# Altium PCB PCB--1.PcbDoc
Units mil, origin at the board's own origin, x right, y up, seen from the top; angles counter-clockwise.
Board outline 2001 x 2590 mil, 2 copper layers (Top Layer, Bottom Layer); 46 components, 41 nets, 162 pads, 88 vias.
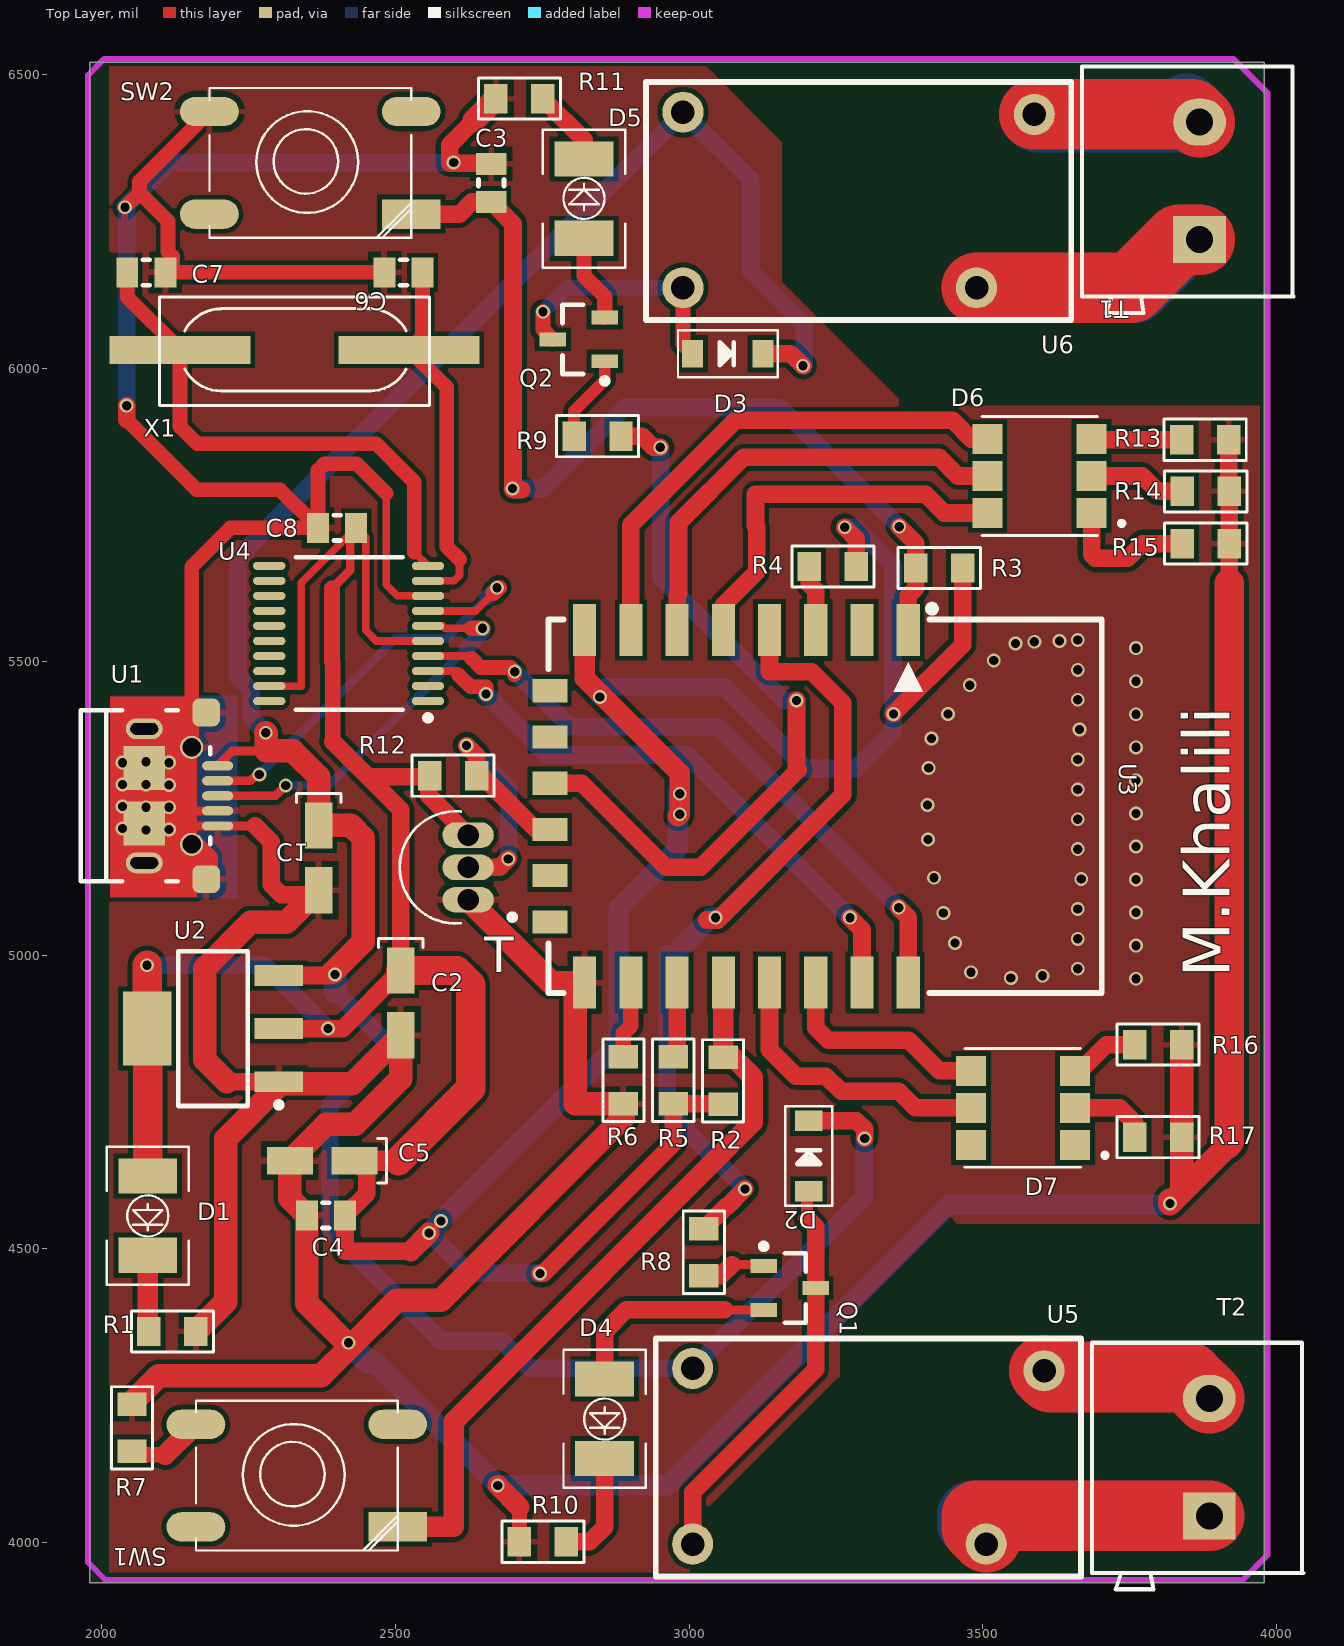
[diagram p0: Top Layer view]
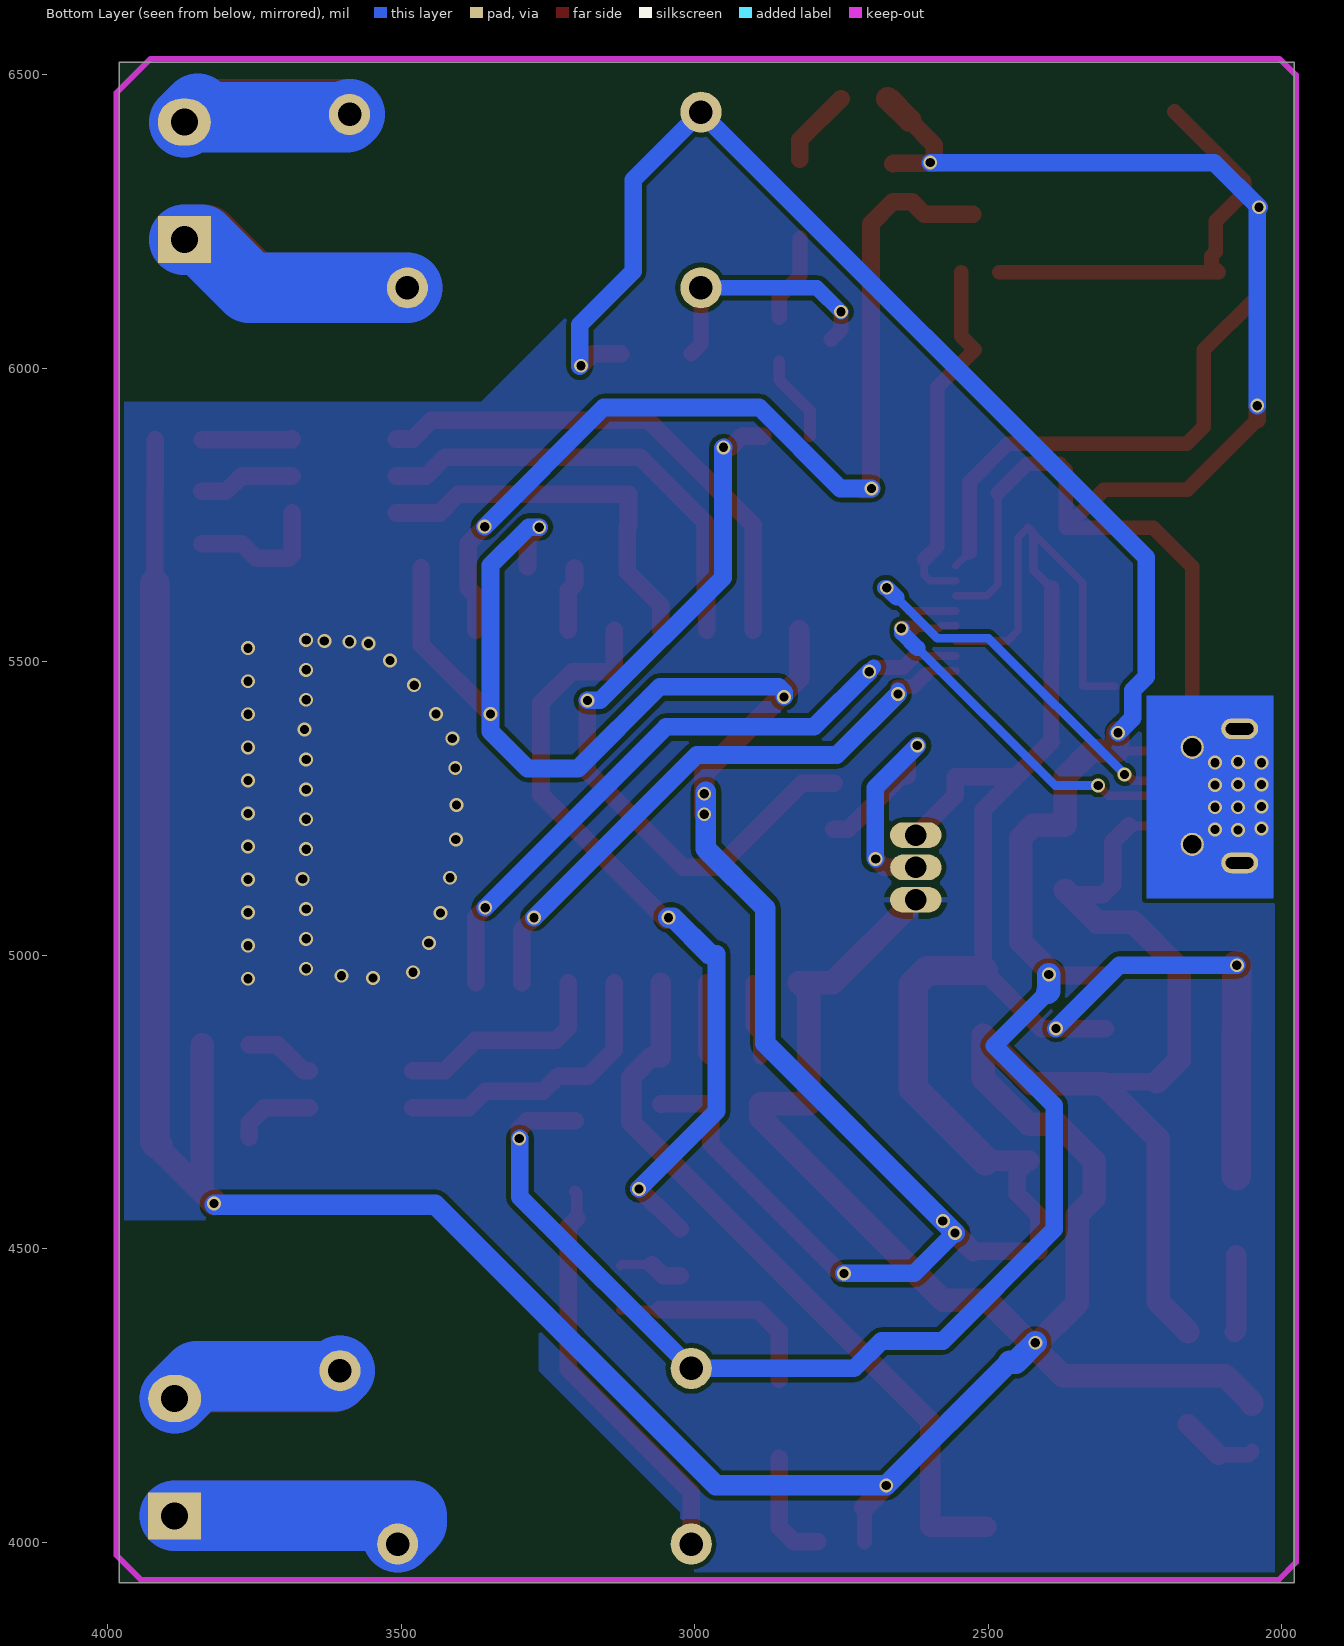
[diagram p1: Bottom Layer view, seen from below]

## Layer stack, top to bottom
Top Solder: solder mask 0.4, Solder Resist, Dk 3.5
Top Layer: signal copper 1.4
Dielectric 1: dielectric 12.6, FR-4, Dk 4.8
Bottom Layer: signal copper 1.4
Bottom Solder: solder mask 0.4, Solder Resist, Dk 3.5

## Board outline
1979,3931 3980,3931 3980,6521 1979,6521

## Design rules (kind name [scope] priority, off if disabled: settings)
Clearance [All] p1: gap=8 ignorepadtopadclearanceinfootprint=FALSE
ComponentClearance ComponentClearance_2 [InComponent('U5')] p1: gap=0 collisioncheckmode=3 verticalgap=0 showdistances=FALSE
ComponentClearance ComponentClearance_1 [InComponent('U6')] p2: gap=0 collisioncheckmode=3 verticalgap=0 showdistances=FALSE
ComponentClearance [All] p3: gap=10 collisioncheckmode=3 verticalgap=10 showdistances=FALSE
PolygonConnect [All] p1: connectstyle=Relief reliefconductorwidth=10 reliefentries=4 polygonreliefangle="90 Angle" airgapwidth=10
RoutingVias [All] p1: holewidth=11.81 width=19.68 viastyle="Through Hole" minholewidth=7.87 minwidth=15.75 maxholewidth=31.5 maxwidth=39.37
SolderMaskExpansion [All] p1: expansion=4
Width [All] p1: maxlimit=400 minlimit=7 preferedwidth=10 minimp=50.000000 maximp=50.000000 favimp=50.000000
29 further rules are at their usual default settings.

## Classes and differential pairs
component class 01_power: C1 C2 D1 R1 U1 U2
component class 02_esp12f: C3 C4 C5 R2 R3 R4 R5 R6 R7 SW1 SW2 U3
component class "03_USB TO UART": C6 C7 C8 U4 X1
component class 04_RELAY: D2 D3 D4 D5 Q1 Q2 R8 R9 R10 R11 T1 T2 U5 U6
component class 05_LEDSTATUS: D6 D7 R13 R14 R15 R16 R17
component class 06_temperture: R12 t T

## Components (designator, comment, footprint, x,y, rotation, side; value= is the part's Value field where it differs from the comment)
C1 "47uF" "CAPP 1206 (3216X18L) Size A" 2369,5221 r270 top
C2 "47uF" "CAPP 1206 (3216X18L) Size A" 2509,4974 r270 top
C3 "100nF" SMD_CAP_0805 2663,6283.04 r90 top
C4 "100nF" SMD_CAP_0805 2413.96,4557 r180 top
C5 "47uF" "CAPP 1206 (3216X18L) Size A" 2430.22,4650 r180 top
C6 "22PF" SMD_CAP_0805 2546,6163.1 r180 top
C7 "22PF" SMD_CAP_0805 2043.04,6163.1 r0 top
C8 "100nF" SMD_CAP_0805 2433,5728 r180 top
D1 "LED-GREEN" TOPLED-GREEN 2078,4624 r270 top
D2 "BZT52C5V6" sod-123 3204,4718 r270 top
D3 "BZT52C5V6" sod-123 3126,6024.66 r180 top
D4 "LED-BLUE" TOPLED-GREEN 2856.07,4278 r270 top
D5 "LED-BLUE" TOPLED-GREEN 2821,6221 r90 top
D6 "SMD-RGB-HI-LIGHT" LED6-SMD-5050 3598,5812.25 r180 top
D7 "SMD-RGB-HI-LIGHT" LED6-SMD-5050 3569.58,4736 r180 top
Q1 "BC817" SOT-23B_N 3171.29,4433.27 r0 top
Q2 "BC8171" SOT-23B_N 2812,6049 r180 top
R1 "330R" 0805R-330 2080,4359 r0 top
R2 "10K" 0805R-10K 3058,4746 r90 top
R3 "10K" 0805R-10K 3466,5659.49 r180 top
R4 "10K" 0805R-10K 3285,5662 r180 top
R5 "10K" 0805R-10K 2972.99,4747 r90 top
R6 "10K" 0805R-10K 2887.98,4747 r90 top
R7 "330R" 0805R-330 2051,4235 r270 top
R8 "100K" 0805R-100K 3025,4524 r270 top
R9 "100K" 0805R-100K 2874,5884 r180 top
R10 "330R" 0805R-330 2791,4001 r180 top
R11 "330R" 0805R-330 2751,6459 r180 top
R12 "4.7K" 0805R-10K 2638,5305.74 r180 top
R13 "330R" 0805R-330 3839,5878 r0 top
R14 "330R" 0805R-330 3840,5790 r0 top
R15 "330R" 0805R-330 3840,5701 r0 top
R16 "330R" 0805R-330 3758.73,4847.77 r0 top
R17 "330R" 0805R-330 3758.73,4690 r0 top
SW1 "SW-PB-A-BLACK-SMD" "SW SMD" 2464.37,4036.16 r180 top
SW2 "SW-PB-A-BLACK-SMD" "SW SMD" 2487.37,6272.16 r180 top
T "DS18B20" TO-92-TO92127P495H2044-3 2593.66,5149.57 r90 top
T1 "2P2S" "Socket Blue 2" 3869.49,6219 r180 top
T2 "2P2S" "Socket Blue 2" 3886,4045 r180 top
U1 "USB Micro B" USB-Micro1 2073.97,5271.45 r90 top locked
U2 "NCP1117ST33T3G" SOT-223 2189,4875 r0 top
U3 "ESP_12_E" ESP_12_E 3373.24,5568.59 r270 top
U4 "CH340T" CH340T 2445.07,5548 r180 top
U5 "Relay_HSIN_DA_982H" Relay-HSIN-DA-982H 3006.07,3997 r0 top
U6 "Relay_HSIN_DA_982H" Relay-HSIN-DA-982H 2989.56,6136.79 r0 top
X1 "12MHz" XTAL-RU49/4 2523,6031 r180 top

## Footprints (in the part's own frame and the unit in brackets; to place one, negate y for a bottom-side part, rotate by r counter-clockwise, add the part's x,y. Pads: shape width x height; smd on the part's side, far side on the other; paste and mask are expansions set on the pad)
0805R-10K [mil]
  rect 40x50 smd: 1(0,0) 2(80,0)
  silkscreen extent -30,-35 110,35, body extent -1,-25 80,25, height 27
0805R-100K [mil]
  rect 40x50 smd: 1(-10,0) 2(70,0)
  silkscreen extent -40,-35 100,35, body extent -11,-25 70,25, height 27
0805R-330 [mil]
  rect 40x50 smd: 1(0,0) 2(80,0)
  silkscreen extent -30,-35 110,35, body extent -1,-25 80,25, height 27
"CAPP 1206 (3216X18L) Size A" [mil]
  rect 78.7x47.2 smd: 1(0,0) 2(110.22,0)
  silkscreen extent -54,-38 -39,38, body extent -17,-36 126,35, height 71
CH340T [mm]
  oval 1.4x0.35 smd: 1(-2.8,2.925) 2(-2.8,2.275) 3(-2.8,1.625) 4(-2.8,0.975) 5(-2.8,0.325) 6(-2.8,-0.325) 7(-2.8,-0.975) 8(-2.8,-1.625) 9(-2.8,-2.275) 10(-2.8,-2.925) 11(4.07,-2.925) 12(4.07,-2.275) 13(4.07,-1.625) 14(4.07,-0.975) 15(4.07,-0.325) 16(4.07,0.325) 17(4.07,0.975) 18(4.07,1.625) 19(4.07,2.275) 20(4.07,2.925)
  silkscreen extent -2.93,-3.3 2.92,3.77, body extent -2.25,-3.3 3.68,3.3, height 1.2
ESP_12_E [mm]
  rect 2.25x1 smd: 1(0.375,0) 2(0.375,-2) 3(0.375,-4) 4(0.375,-6) 5(0.375,-8) 6(0.375,-10) 7(0.375,-12) 8(0.375,-14) 15(15.625,-14) 16(15.625,-12) 17(15.625,-10) 18(15.625,-8) 19(15.625,-6) 20(15.625,-4) 21(15.625,-2) 22(15.625,0)
  rect 1x1.5 smd: 9(3,-15.5) 10(5,-15.5) 11(7,-15.5) 12(9,-15.5) 13(11,-15.5) 14(13,-15.5)
  silkscreen extent -0.7,-15.57 16.08,8.37, body extent 0,-15.49 16,8.51, height 2.75
LED6-SMD-5050 [mm]
  rect 1.3x1.3 smd: 1(-2.225,1.498) 2(-2.225,-0.102) 3(-2.225,-1.702) 4(2.275,-1.702) 5(2.275,-0.102) 6(2.275,1.498)
  silkscreen extent -3.62,-2.67 2.53,2.47, body extent -2.77,-2.68 2.77,2.42, height 1.6
Relay-HSIN-DA-982H [mil]
  round 70 hole 40: 1(0,0) 2(500,0) 3(0,299.21) 4(598.43,295.28)
  silkscreen extent -63,-55 661,350
SMD_CAP_0805 [mm]
  rect 0.95x1.3 smd: 1(0,0) 2(1.65,0)
  silkscreen extent 0.67,-0.55 0.97,0.55, body extent -0.19,-0.63 1.84,0.63, height 0.65
"Socket Blue 2" [mil]
  rect 90x80 hole 46: 1(0,0)
  oval 90x80 hole 46: 2(0,-200)
  silkscreen extent -160,-295 200,125, body extent -157,-295 200,127, height 493
sod-123 [mm]
  rect 0.9x1.2 smd: A(3.048,0) K(0,0)
  silkscreen extent -0.64,-1.02 3.68,1.02, body extent -0.18,-0.87 3.3,0.87, height 0.79
SOT-23B_N [mm]
  rect 1.15x0.6 smd: 1(-1.125,0.95) 2(-1.125,-0.95) 3(1.125,0)
  silkscreen extent -1.25,-1.5 0.7,1.92, body extent -0.7,-1.5 0.7,1.5, height 1.14
SOT-223 [mm]
  rect 2.1x0.9 smd: 1(2.85,-2.3) 2(2.85,0) 3(2.85,2.3)
  rect 2.1x3.2 smd: 2(-2.85,0)
  silkscreen extent -1.5,-3.42 2.98,3.35, body extent -3.54,-3.25 3.54,3.25, height 1.65
"SW SMD" [mm]
  rect 2.54x1.27 smd: 1(-1,0.25)
  oval 2.54x1.27 smd: 2(7.731,-4.187) 3(-1,-4.187) 4(7.731,0.25)
  silkscreen extent -1,-5.21 7.73,1.27, body extent -0.71,-5.22 7.54,1.27, height 3.56
TO-92-TO92127P495H2044-3 [mm]
  oval 1.11x2.22 hole 0.93: 1(-1.397,-0.762) 2(0,-0.76) 3(1.397,-0.762)
  silkscreen extent -2.43,-2.8 2.43,2.2, body extent -2.28,-1.84 2.28,1.78, height 15.37
TOPLED-GREEN [mil]
  rect 60x100 smd: A(0,0) K(135,0)
  silkscreen extent -50,-70 185,70, body extent -20,-60 154,60, height 75
USB-Micro1 [mm]
  oval 0.4x1.35 smd: 1(1.3,-3.125) 2(0.65,-3.125) 3(0,-3.125) 4(-0.65,-3.125) 5(-1.3,-3.125)
  rrect50% 1.2x1.2 smd: S(-3.606,-2.629) S(3.606,-2.628)
  oval 0.9x1.6 hole 0.5 slot 1.2 at 90 deg: S(-2.9,0.05) S(2.9,0.05)
  round 1 hole 0.8: S(-2.1,-2) S(2.1,-2)
  rect 1.9x1.8 smd: S(-1.2,0.05) S(1.2,0.05)
  silkscreen extent -3.7,-2.8 3.7,2.8, body extent -3.93,-2.9 3.93,2.76, height 2.78
XTAL-RU49/4 [mil]
  rect 240x47.24 smd: 1(0,0) 2(390,0)
  silkscreen extent -35,-90 425,95, body extent -78,-90 468,95, height 120

## Part data
C1 C2 C5: library part Cap-Polar, "Polar Capacitor", Voltage=16V, Adding Date=1387/12/20, Designer="Saeid Jorablo", Organazation=ControTec
C3 C4 C6 C7 C8: library part Cap-Bipolar, "Bipolar Capacitor", Voltage=100V, Adding Date=1387/12/20, Designer="Saeid Jorablo", Organazation=ControTec
D1 D4 D5: library part TOPLED-GREEN, "TOPLED-GREEN"
D2 D3: "DIODE / DIODE-B", Supplier Part Number 1=BZT52C5V6-FDITR-ND, Supplier 1=Digi-Key
D6 D7: library part SMD-RGB-HI-LIGHT(6P-L5.0*W5.0*H1.5MM), "LED Lighting COBs, Engines, Modules - Red, Green, Blue _RGB_", Package="SparkFun Electronics", Availability=Unavailable, MF="SparkFun Electronics", MP=5050RGB, Price=None, SnapEDA_Link=https://www.snapeda.com/parts/5050RGB/SparkFun%20Electronics/view-part/106347/?ref=snap
Q1: "NPN Bipolar Transistor", LatestRevisionDate=29-May-2009, LatestRevisionNote="IPC-7351 Footprint Added.", PackageDescription="3-Pin SOT-23 Package 0.95 mm Pitch, 2.4 mm Lead Span", PackageReference=SOT-23B, PackageVersion=Aug-1999, Published=8-Jun-2000, Publisher="Altium Limited"
Q2: library part BC817, "NPN Bipolar Transistor", LatestRevisionDate=29-May-2009, LatestRevisionNote="IPC-7351 Footprint Added.", PackageDescription="3-Pin SOT-23 Package 0.95 mm Pitch, 2.4 mm Lead Span", PackageReference=SOT-23B, PackageVersion=Aug-1999, Published=8-Jun-2000, Publisher="Altium Limited"
R1 R7 R10 R11 R13 R14 R15 R16 R17: library part 0805R-330, "RESISTOR 0805 1/4 WATT THIN FILM"
R2 R3 R4 R5 R6 R12: library part 0805R-10K, "RESISTOR 0805 1/4 WATT THIN FILM"
R8 R9: library part 0805R-100K, "RESISTOR 0805 1/4 WATT THIN FILM", Supplier Part Number 1=RMCF0805FT100KTR-ND, Supplier 1=Digi-Key
SW1 SW2: "PUSHBUTTON SWITCH 6MM SMD"
T: "Temperature Sensor Digital, Local -55°C ~ 125°C 12 b TO-92-3", Package="TO-92 Maxim Integrated", Availability=Unavailable, MF="Maxim Integrated", MP=DS18B20, Price=None, SnapEDA_Link=https://www.snapeda.com/parts/DS18B20/Maxim%20Integrated/view-part/1266091/?ref=snap
T1 T2: library part "Transformer 2P2S", "Transformer 2 Primary , 2 Secondry", Power=100W, Voltage Ratio=220:9, Adding Date=1387/01/22, Company=ControTEK, Designer="Saeid jorablo"
U1: library part "USB Micro SMD", "USB 2.0, Right Angle, SMT, B Type, Receptacle, 5 Position, Black", PackageDocument=27-Jun-2003, ComponentLink1Description="Manufacturer Link", ComponentLink1URL=http://www.tycoelectronics.com/, ComponentLink2Description="Packaging Specification", ComponentLink2URL=http://ecommas.tycoelectronics.com/commerce/DocumentDelivery/DDEController?Action=showdoc&DocId=Customer+Drawing%7F440247%7FD%7Fpdf%7FEnglish%7FC_440247_D.pdf, ContactMaterial="Copper Alloy", ContactPlating="Gold (30)", DatasheetDocument=27-Jun-2003, DrillSize="Corresponds to nominal value.", HousingMaterial=Thermoplastic, PackageReference=440247, PanelGround=Without, PCB_Layout="Complies with manufacturer's recommendation.", Published=15-Jul-2004, Publisher="Altium Limited"
U2: library part NCP1117, "NCP1117, NCV1117. 1.0 A Low-Dropout Positive  Fixed and Adjustable  Voltage Regulators"
U3: "ESP-12 Wi-Fi Module by AI-Thinker", IC=ESP8266-EX, Vendor=Ai-thinker
X1: library part CRYSTAL-GENERIC, "GENERIC CRYSTAL"

## Via types
v1: diameter 23.62, hole 15.75, Top Layer to Bottom Layer, 88 vias

## Nets (pads, with @x,y where several pads share a name; then routed paths per layer and width w, separated by ;. In a path a pad name is that pad's centre, name@x,y a point inside that pad or via, vN(x,y) a via of type N, cw(c..) or ccw(c..) an arc to the next point about the centre after c; other vN are vias at no path point)
+3V3: C2.1 C4.1 C5.1 C8.1 D1.A R2.1 R3.1 R4.1 R5.1 R12.2 T.3 U2.2 U3.8 U4.5 U4.19 | length 6906
  Top Layer w13: U4.19 2339.57,5458.43 2339.57,5634.57 C8.1@2423,5718 ; C8.1 2449,5712 2449,5553.41 2467.2,5535.2 U4.5
  Top Layer w15: 2392,5625 2423,5656 2423,5718 C8.1
  Top Layer w27: 2392,5625 2392,5500 2393,5499 2393,5364
  Top Layer w30: U2.2@2301.2,4875 v1(2385,4875) 2410,4875 C2.1 2509,5248 2453,5304 ; 2393,5364 2453,5304 ; C5.1 2451,4629.22 2451,4594.04 C4.1 2413.96,4496.04 2526.04,4496.04 ; T.3 2556.26,5271.97 2556.26,5304 2453,5304 ; v1(2746,4458) 2752,4458 2972.99,4678.99 R5.1 3057,4747 R2.1 ; v1(3265,5729) 3285,5709 R4.1 ; v1(3348,5411) 3466,5529 R3.1
  Top Layer w35: C5.1 2505,4650 ; 2526.04,4496.04 v1(2557,4527) ; U3.8 2822.06,5471.94 2984,5310 v1(2984,5275) v1(2984,5240) v1@2981,5237
  Top Layer w50: v1(2076.8,4983) 2076.8,4875 2078,4873.8 D1.A ; 2505,4650 2628,4773 2628,4950 2604,4974 C2.1
  Bottom Layer w30: v1(2076.8,4983) 2277,4983 v1(2385,4875) ; v1(2557,4527) 2626,4458 v1(2746,4458) ; v1(2848,5440) 2848,5448 2857,5457 3060,5457 3199,5318 3285,5318 3348,5381 v1(3348,5411) 3348,5664 3283,5729 v1(3265,5729)
  Bottom Layer w35: v1(2557,4527) v1(2577.52,4547.52) 2880,4850 2880,5080 2981,5181 v1@2981,5278
+5V: C1.1 D2.K D3.K U1.1 U2.3 U5.3 U6.3 | length 4583.3
  Top Layer w15: U1.1 2222.36,5348 2280,5348
  Top Layer w30: U2.3 v1@2387.55,4965.55 ; D3.K 3173.34,6024.66 v1(3194,6004) ; D2.K 3285,4718 3299,4704 v1(3299,4688)
  Top Layer w40: v1(2279,5379) 2280,5378 2280,5348 2325,5348 2369,5304 C1.1 2424,5221 2445,5200 2445,5023 v1@2393,4971
  Bottom Layer w30: v1(2279,5379) 2254,5404 2254,5451.53 2231,5474.53 2231,5677.44 U6.3 3105,6320.56 3105,6165 3196,6074 v1@3196,6003 ; 2399,4937 2490,4846 2388,4744 2388,4533 2578,4343 2682,4343 2728.79,4296.21 U5.3 3298,4588.14 v1@3298,4688
  Bottom Layer w40: v1(2397,4967) 2397,4939 2399,4937
GND: C1.2 C2.2 C3.2 C4.2 C5.2 C6.2 C7.2 C8.2 R1.2 R6.1 R7.1 R10.2 R11.2 R13.2 R14.2 R15.2 R16.2 R17.2 SW2.2 T.1 U1.4 U1.5 U1.S U2.1 U3.15 U4.8 | length 10822.9
  Top Layer w13: 2484,5787 2484,5631 2503.02,5611.98 U4.8
  Top Layer w15: v1@2113,5245.86 U1.4 ; v1@2113.27,5220.27 U1.5 2261,5220.27
  Top Layer w25: v1(2039,6274) 2064,6299 ; 2042,5912 2161,5793 2303.04,5793 C8.2 ; U1.S@2152.71,5354.13 2152.71,5661.71 2219,5728 C8.2 ; SW2.2 2064,6318 2064,6299 ; C6.2 C7.2 2120,6175.1 2120,6190.63 2112.5,6198.13 2112.5,6250.5 2064,6299 ; 2484,5787 2434,5837 2379,5837 2368.04,5826.04 C8.2
  Top Layer w26: R10.2 2711,4060
  Top Layer w30: 2042,5912 v1(2042,5936) ; 2212.55,4784.45 U2.1 ; 2261,5220.27 2288,5193.27 2288,5120 2305,5103 C1.2@2361.22,5103 ; 2634,6422 2592,6380 2592,6349 2662,6349 C3.2 ; 3915,4677 3917,4675 ; R13.2 3919,5791 R14.2 R15.2 3920,5634
  Top Layer w35: v1(2674,4097) 2711,4060
  Top Layer w40: R7.1 2051,4238 2097,4284 2373.65,4284 v1@2422.83,4333.17 ; U1.S@2152.71,5188.78 2177.46,5164.03 U1.S@2177.46,5129.47 ; R1.2 2211,4410 2211,4687.35 2304.65,4781 2426.22,4781 C2.2 2509,4790 2431,4712 2382,4712 C5.2 2320,4586 C4.2 2349,4407 v1@2422.83,4333.17 ; 2212.55,4784.45 2175,4822 2175,4978 2253,5056 2314.22,5056 2361.22,5103 C1.2 ; T.1 2764.79,4953.43 U3.15 2806,4937.38 2806,4747 R6.1 2887.98,4722.98 2577,4412 2501.65,4412 v1@2422.83,4333.17 ; 2634,6422 R11.2 ; v1@3819,4583 v1(3819,4577) 3838.73,4596.73 ; R16.2 R17.2 3838.73,4596.73 ; 3917,4675 3838.73,4596.73
  Top Layer w50: 3915,4677 3920,4682 3920,5634
  Bottom Layer w20: v1(2039,6274) v1@2042,6271
  Bottom Layer w30: v1(2039,6274) 2115,6350 v1(2599,6350) ; v1(2042,5936) v1@2042,6271
  Bottom Layer w35: 2464,4307 v1(2674,4097) 2964,4097 3442,4575 v1@3818,4575
  Bottom Layer w40: v1(2420,4340) 2453,4307 2464,4307
  other v1: 3761,4960 3548,4961 3602,4965 3480,4971 3662,4977 3761,5016.3 3453,5021 3662,5027.91 3433,5072 3761,5072.6 3662,5078.82 3761,5128.9 3668,5129.73 3417,5132 3662,5180.64 3761,5185.2 3407,5197 2075,5213.33 2114,5214 2035,5216 3662,5231.55 3761,5241.5 2075,5252 2114,5252 2035,5253.33 3406,5256 3662,5282.45 2114,5290 2035,5290.67 2075,5290.67 3761,5297.8 3408,5319 2035,5328 2114,5328 2075,5329.33 3662,5333.36 3761,5354.1 3413,5369 3665,5384.27 3761,5410.4 3441,5411 3662,5435.18 3478,5460 3761,5466.7 3662,5486.09 3519,5502 3761,5523 3556,5531 3588,5534 3631,5535 3662,5537
LAMP1+220V~: T2.1 U5.2 | length 888.6
  Top Layer w120: U5.2@3506.07,4009 3490,4025.07 3490,4045 T2.1
  Bottom Layer w120: U5.2@3506.07,4009 3482,4033.07 3482,4045 T2.1
LAMP1~GND: T2.2 U5.4 | length 602.2
  Top Layer w120: U5.4 3615.77,4281 3850,4281 T2.2
  Bottom Layer w120: U5.4 3613.77,4283 3848,4283 T2.2
LAMP2+220V~: T1.1 U6.2 | length 828
  Top Layer w120: U6.2 3752.79,6136.79 3835,6219 T1.1
  Bottom Layer w120: U6.2 3758.79,6136.79 3841,6219 T1.1
LAMP2~GND: T1.2 U6.4 | length 585.8
  Top Layer w120: U6.4 3856.43,6432.06 T1.2
  Bottom Layer w120: U6.4 3593.05,6427 3832.51,6427 3847,6441.49 T1.2
NetC3_1: C3.1 R3.2 SW2.1 U3.1 | length 1663.7
  Top Layer w10: SW2.1 SW2.1@2530.43,6266
  Top Layer w30: SW2.1 2609.32,6262.31 2630.04,6283.04 C3.1 2700,6246.04 2700,5793 2715,5793 ; v1(3358,5730) 3386,5702 R3.2 3386,5625 3373.24,5612.24 U3.1
  Bottom Layer w30: v1(2699,5795) 2752,5795 2890,5933 3155,5933 v1(3358,5730)
NetD1_K: D1.K R1.1 | length 130.8
  Top Layer w35: D1.K 2078,4361 R1.1
NetD2_A: D2.A Q1.3 U5.1 | length 695.1
  Top Layer w20: 3201,4552 3201,4595 D2.A
  Top Layer w30: U5.1 3006.07,4085.07 3215.58,4294.58 Q1.3 3215.58,4537.42 3201,4552
NetD3_A: D3.A Q2.3 U6.1 | length 428.3
  Top Layer w26: v1(2751,6096) 2751,6065.71 Q2.3 ; U6.1 2989.56,6041.1 D3.A
  Bottom Layer w26: v1(2751,6096) 2791.79,6136.79 U6.1
NetD4_A: D4.A Q1.2 | length 367.2
  Top Layer w15: 3060.87,4395.87 Q1.2
  Top Layer w30: D4.A 2856.07,4359.07 2892.87,4395.87 3060.87,4395.87
NetD4_K: D4.K R10.1 | length 192.4
  Top Layer w30: R10.1 2831,4001 2856.07,4026.07 D4.K
NetD5_A: D5.A Q2.2 | length 149.2
  Top Layer w26: D5.A 2821,6157 2856.29,6121.71 Q2.2
NetD5_K: D5.K R11.1 | length 132
  Top Layer w30: R11.1 2821,6389 D5.K
NetD6_1: D6.1 R15.1 | length 238.3
  Top Layer w30: D6.1 3685.58,5682.42 3692,5676 3747,5676 3772,5701 R15.1
NetD6_2: D6.2 R14.1 | length 165.3
  Top Layer w30: D6.2 3771.75,5816.25 3798,5790 R14.1
NetD6_3: D6.3 R13.1 | length 153.9
  Top Layer w30: D6.3 3686.82,5878 R13.1
NetD6_4: D6.4 U3.7 | length 873.6
  Top Layer w30: U3.7 2900.8,5732.8 3078.99,5910.99 3449.01,5910.99 3480.76,5879.24 D6.4
NetD6_5: D6.5 U3.6 | length 769.7
  Top Layer w30: U3.6 2979.54,5613.54 2982,5616 2982,5737 3093,5848 3426,5848 3457.75,5816.25 D6.5
NetD6_6: D6.6 U3.5 | length 664.1
  Top Layer w30: U3.5 3058.28,5596.28 3115,5653 3115,5729.01 3113.01,5731 3113.01,5785.01 3402.99,5785.01 3434.74,5753.26 D6.6
NetD7_2: D7.2 R17.1 | length 136.5
  Top Layer w30: D7.2 3733,4740 3758.73,4714.27 R17.1
NetD7_3: D7.3 R16.1 | length 120.1
  Top Layer w30: D7.3 3665.99,4802.99 3710.77,4847.77 R16.1
NetD7_4: D7.4 U3.20 | length 371.8
  Top Layer w30: U3.20 3215.76,4876.24 3237,4855 3374,4855 3426.01,4802.99 D7.4
NetD7_5: D7.5 U3.19 | length 498.4
  Top Layer w30: U3.19 3137.02,4838.98 3182,4794 3233,4794 3259,4768 3357,4768 3385,4740 D7.5
NetQ1_1: Q1.1 R8.2 | length 110.8
  Top Layer w15: 3073,4473 3124.67,4473 Q1.1
  Top Layer w30: R8.2 3054,4454 3073,4473
NetQ2_1: Q2.1 R9.2 | length 149.3
  Top Layer w20: R9.2 2804,5927 2856.29,5979.29 Q2.1
NetR2_2: R2.2 SW1.1 U3.18 | length 1264.4
  Top Layer w35: SW1.1 2599,4026.32 2599,4205.94 3108.5,4715.44 3108.5,4792.5 3075,4826 R2.2 3058.28,4826.28 U3.18
NetR4_2: R4.2 U3.3 | length 110.1
  Top Layer w30: R4.2@3205,5659.49 3205,5632 3215.76,5621.24 U3.3
NetR5_2: R5.2 U3.17 | length 129.1
  Top Layer w30: R5.2 2979.54,4833.55 U3.17
NetR6_2: R6.2 U3.16 | length 131.7
  Top Layer w26: R6.2 2887.98,4866.98 2900.8,4879.8 U3.16
NetR7_2: R7.2 SW1.2 | length 133
  Top Layer w26: R7.2 2057,4149 2108,4149
  Top Layer w35: 2108,4149 SW1.2
NetR8_1: R8.1 U3.4 | length 1355.5
  Top Layer w30: R8.1 3063,4572 3065,4572 v1(3095,4602) ; 3030,5060 3049,5060 3262,5273 3262,5430 3209.02,5482.98 3137.02,5482.98 U3.4
  Bottom Layer w30: 2975,5002 2963,5002 2963,4734 v1(3095,4602)
  Bottom Layer w35: 2975,5002 3037,5064 v1(3045,5064)
NetR9_1: R9.1 U3.11 | length 1285.1
  Top Layer w30: U3.11 2817,5293 2960,5150 3020,5150 3186,5316 3183,5319 v1(3183,5434) ; R9.1 2920,5884 2939,5865 v1(2951,5865)
  Bottom Layer w30: v1(2951,5865) 2952,5864 2952,5643 3161,5434 v1(3183,5434)
NetR12_1: R12.1 T.2 U3.12 | length 518.8
  Top Layer w30: v1(2621,5357) 2638,5340 R12.1 2647.26,5305.74 2738.74,5214.26 U3.12 ; T.2 2677.57,5149.57 v1(2692,5164)
  Bottom Layer w30: v1(2621,5357) 2693,5285 2693,5165 v1(2692,5164)
NetU1_2: U1.2 U4.7 | length 752.4
  Top Layer w13: U4.7 2636.39,5586.39 v1@2667,5617
  Top Layer w15: U1.2 2253,5297.05 2263.95,5308 v1(2268,5308)
  Top Layer w27: v1@2667,5617 v1@2676,5626
  Bottom Layer w15: v1(2268,5308) 2500,5540 2587,5540 2656,5609
  Bottom Layer w27: 2656,5609 v1(2673,5626) v1@2676,5626
NetU1_3: U1.3 U4.6 | length 667.9
  Top Layer w13: U4.6 2580.2,5560.8 2584.2,5556.8 2629,5556.8
  Top Layer w15: U1.3 2295.45,5271.45 v1(2313,5289)
  Top Layer w27: 2629,5556.8 v1(2648.2,5556.8)
  Bottom Layer w15: v1(2313,5289) 2386,5289 2621,5524 2621,5523
  Bottom Layer w27: 2621,5523 2647,5549 v1@2647,5556
NetU3_21: U3.21 U4.3 | length 1021.8
  Top Layer w13: U4.3 2606.98,5484.02
  Top Layer w25: 2608,5477 2628,5457 2654,5457 v1(2654,5445)
  Top Layer w30: v1(3274,5064) 3294.5,5043.5 U3.21
  Bottom Layer w25: v1(2654,5445) v1@2654,5452
  Bottom Layer w30: v1(2654,5445) 2758,5341 2997,5341 v1(3274,5064)
NetU3_22: U3.22 U4.4 | length 1130.3
  Top Layer w13: U4.4 2625.39,5509.61 2629.5,5505.5
  Top Layer w25: 2629.5,5505.5 2645,5490 2696,5490 v1(2703,5483) 2703,5479 v1@2702,5478
  Top Layer w30: v1(3357,5081) 3373.24,5064.76 U3.22
  Bottom Layer w25: v1@2695,5491 v1(2703,5483)
  Bottom Layer w30: v1(2703,5483) 2797,5389 3049,5389 v1(3357,5081)
XI: C6.1 U4.9 X1.1 | length 618.9
  Top Layer w13: U4.9 2599.57,5637.57 2609,5647 2609,5674
  Top Layer w25: C6.1 2546,6054 X1.1 2587,5967 2587,5696 2609,5674
XO: C7.1 U4.10 X1.2 | length 890.8
  Top Layer w13: 2532,5686.46 U4.10
  Top Layer w25: C7.1 2043.04,6120.96 X1.2 2133,5900 2162,5871 2467,5871 2532,5806 2532,5686.46
pads on no net: D7.1 D7.6 SW1.3 SW1.4 SW2.3 SW2.4 U3.2 U3.9 U3.10 U3.13 U3.14 U4.1 U4.2 U4.11 U4.12 U4.13 U4.14 U4.15 U4.16 U4.17 U4.18 U4.20

## Polygon pours and split planes (outlines as drawn)
GND on Top Layer "Top Layer-No Net" (solid, remove dead copper, pour order 0): 1999,6527 3010,6527 3013,6530 3158,6385 3158,6147 3357,5948 3357,5936 3975,5936 3981,5930 3981,4543 3457,4543 3444,4556 3257,4369 3257,4281 3254,4281 3026,4053 3038,4041 3038,3944 1995,3944 1992,3947 1999,3954
GND on Bottom Layer "Top Layer-No Net" (solid, remove dead copper, pour order 2): 1999,6527 3026,6527 3160,6393 3160,6147 3364,5943 3981.89,5943 3984.89,5940 3975,5930.11 3975,4549 3446,4549 3440,4555 3266,4381 3266,4292 3025,4051 3025,3942 3019,3936 1999,3936

## Keep-outs
Keep-Out Layer:
  lines w10: 1976,3966 1976,6499 2004,6527 3927,6527 3984.89,6469.11 3984.89,5767.15 3984.89,3977.89 3943,3936 2006,3936 1976,3966

## Other copper
Top Layer:
  rectangle net GND: 2014,5099 2162,5441
Bottom Layer:
  rectangle net GND: 2014,5097 2231,5442

## Silkscreen, mask and mechanical layers (free items; w line width, h text height)
Top Overlay:
  text "M.Khalili" at 3921,4962 h80 r90

## Dimensions
2004,6527 to 2006,3936 on Bottom Solder
2004,6527 to 3984.89,6469.11 on Bottom Solder

## Text inside footprints (layer, text, board x,y; h text height)
U3: Mechanical 13 "CUTOUT POLYGON" at 3613.24,5283.59 h30 r270; Mechanical 13 "ANTENNA AREA" at 3633.24,5283.59 h30 r270